# EAGLE board lock-board2_esp8266 (EAGLE 7.6.0)
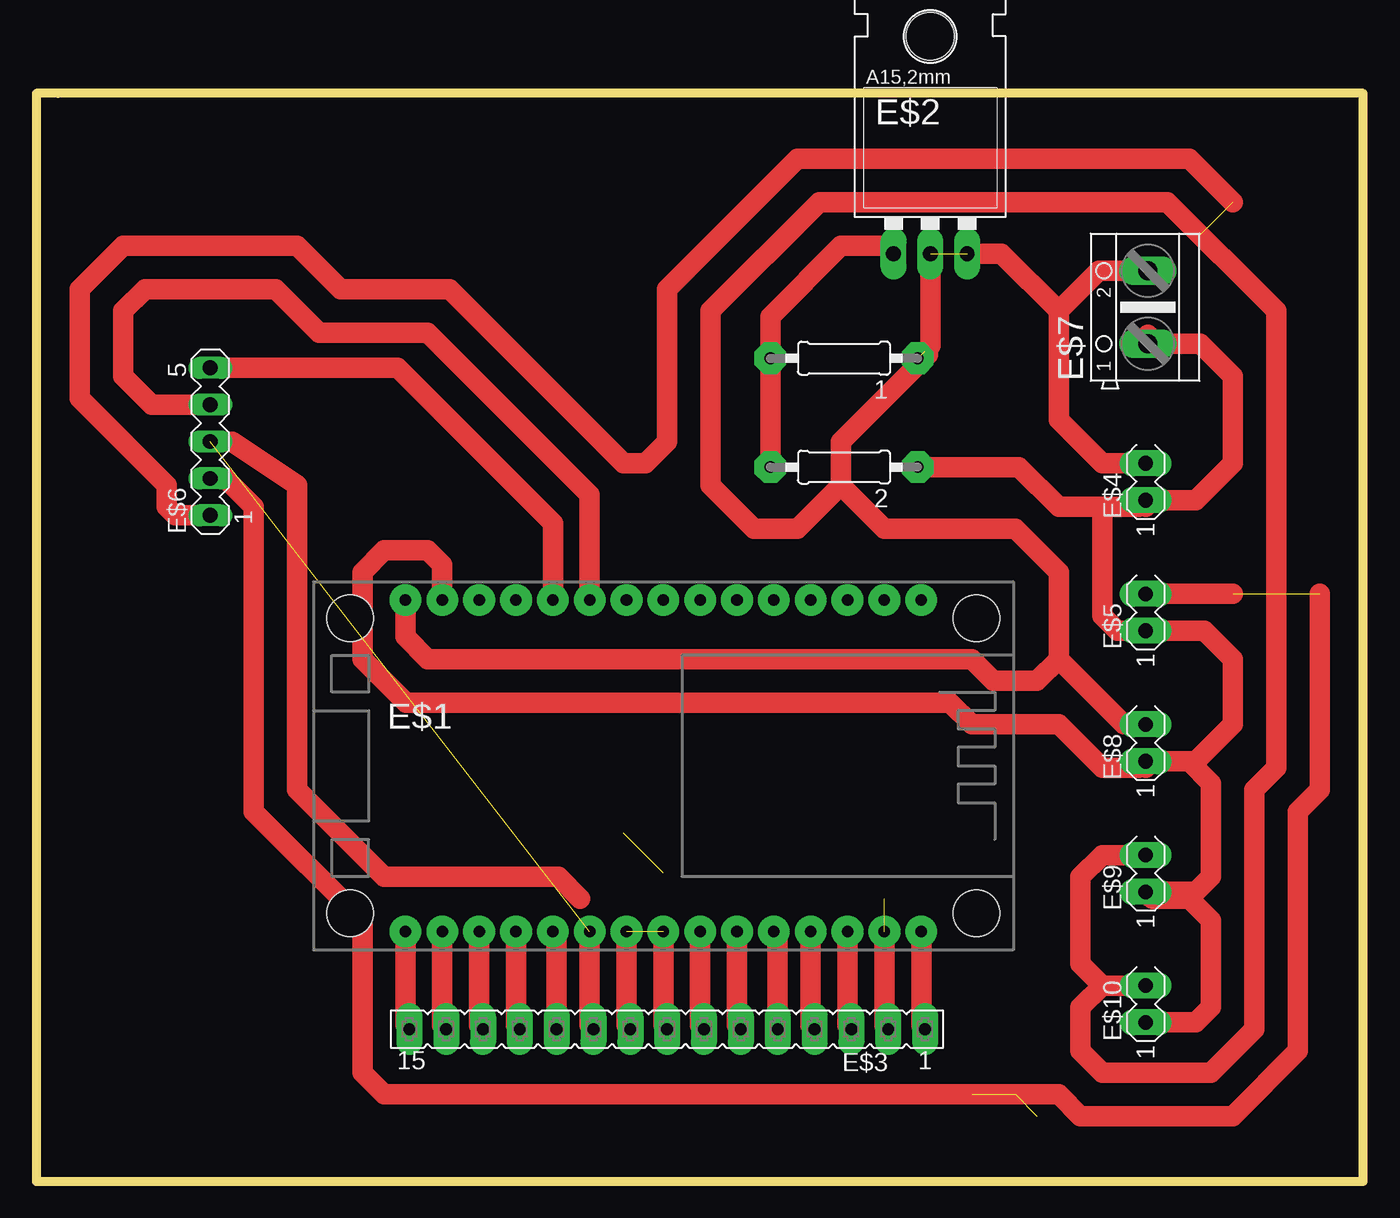
[diagram p0: board, top side]
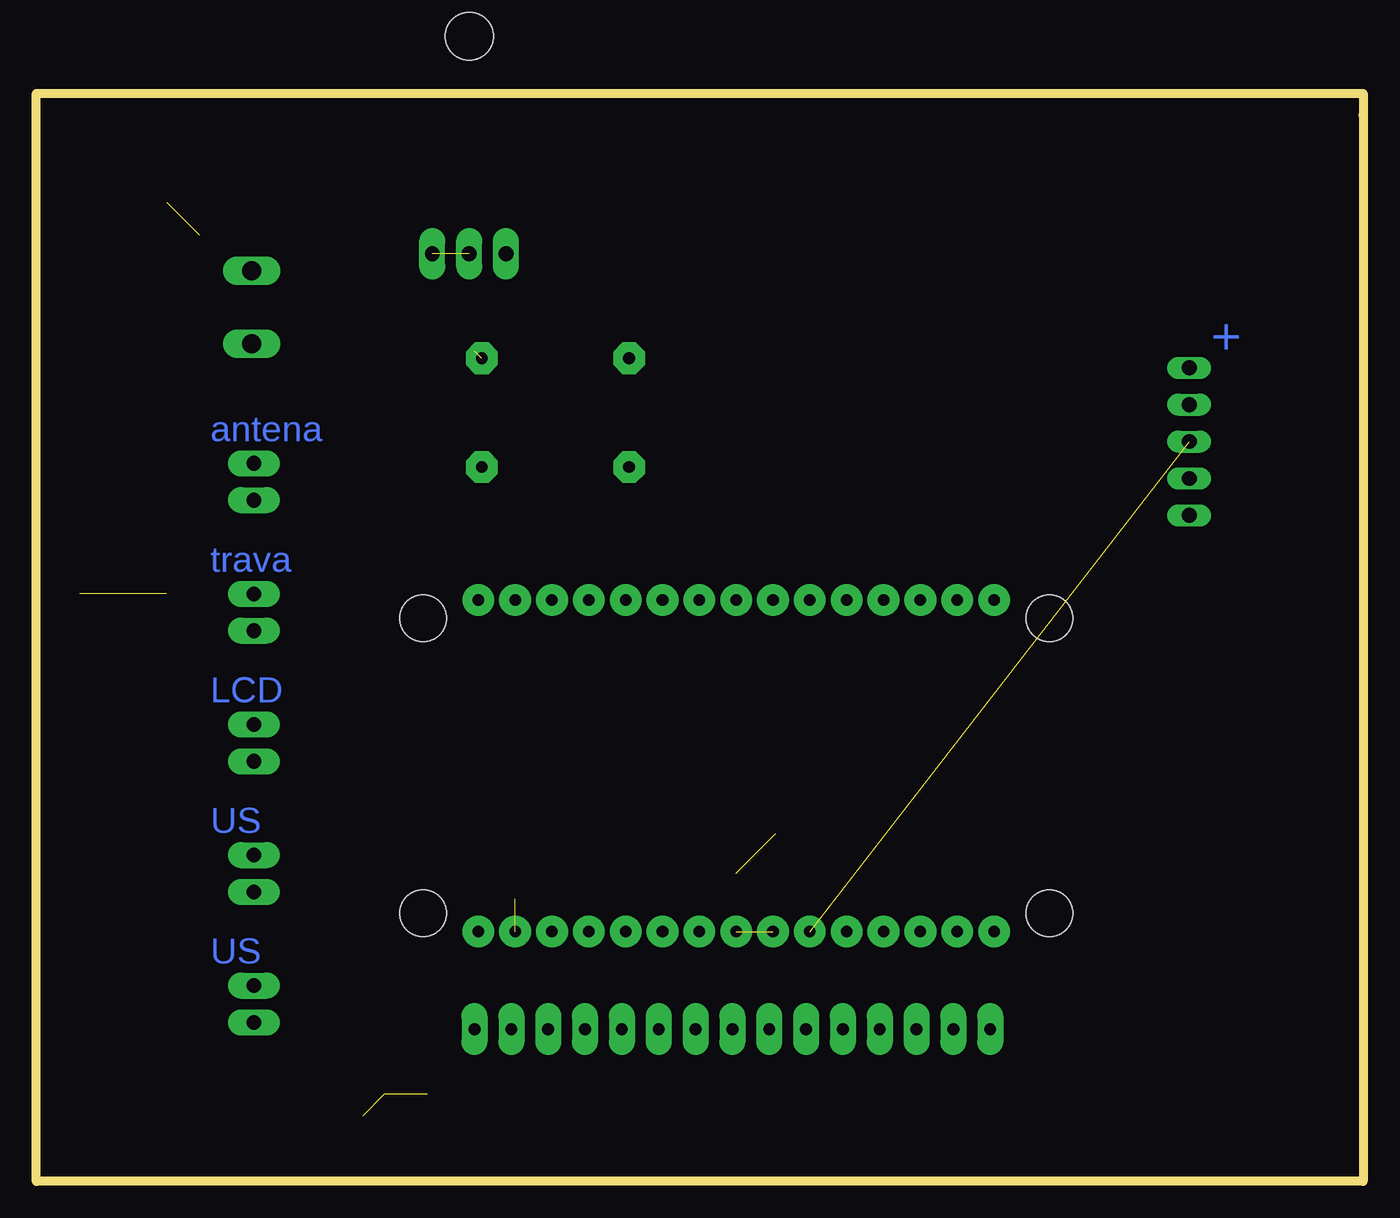
[diagram p1: board, bottom side, seen from below]

Size 91.5 x 75 mm. Coordinates in mm from the lower left corner, seen from the top.
Outline: 1.5,75 0,75 0,73.5 0,0 91.5,0 91.5,75 1.5,75
Copper layers (1*16): Top 0.035mm / dielectric 1.5mm / Bottom 0.035mm
Design rules "default": minimum track width 10mil, minimum drill 24mil, track to track 8mil, track to pad 8mil, pad to pad 8mil, via to via 8mil, smd to smd 8mil, copper to edge 40mil, drill to drill 8mil, minimum pad ring 10mil, minimum via ring 8mil, stop-mask expansion 4mil, vias tented up to drill 0mil, thermal gap 10mil
Net classes: 0 default: clearance 0.205 mm

## Footprints (pad centres in the part's own frame; a part is rotated, then mirrored left to right if it is on the bottom)
0207/10 = drill 0.813 pad 2.184 octagon: 1 -5.08,0; 2 5.08,0
ESP12E_DEVKIT = drill 0.8 pad 2.184: 3V3@0 -11.43,-7.62; 3V3@1 11.43,5.08; 3V3@2 11.43,-17.78; AD0 -11.43,17.78; CLK -11.43,-2.54; CMD -11.43,2.54; D0 11.43,17.78; D1 11.43,15.24; D2 11.43,12.7; D3 11.43,10.16; D4 11.43,7.62; D5 11.43,0; D6 11.43,-2.54; D7 11.43,-5.08; D8 11.43,-7.62; EN -11.43,-10.16; GND@0 -11.43,-5.08; GND@1 -11.43,-15.24; GND@2 11.43,2.54; GND@3 11.43,-15.24; RST -11.43,-12.7; RSV@0 -11.43,15.24; RSV@1 -11.43,12.7; RX 11.43,-10.16; SD0 -11.43,0; SD1 -11.43,5.08; SD2 -11.43,7.62; SD3 -11.43,10.16; TX 11.43,-12.7; VIN -11.43,-17.78 | hole 3.2: -10.16,21.59; 10.16,21.59; 10.16,-21.59; -10.16,-21.59
317TL = drill 1.016 pad 1.778 long: 1 -2.54,-3.81; 2 0,-3.81; 3 2.54,-3.81 | hole 3.302: 0,11.176
FE15 = drill 0.813 pad 1.778 long: 1 -17.78,0; 2 -15.24,0; 3 -12.7,0; 4 -10.16,0; 5 -7.62,0; 6 -5.08,0; 7 -2.54,0; 8 0,0; 9 2.54,0; 10 5.08,0; 11 7.62,0; 12 10.16,0; 13 12.7,0; 14 15.24,0; 15 17.78,0
MA03-1 = drill 1.016 pad 1.778 long: 1 -2.54,0; 2 0,0
MA05-1 = drill 1.016 long: 1 -5.08,0; 2 -2.54,0; 3 0,0; 4 2.54,0; 5 5.08,0
AK500/2 = drill 1.321 long: 1 -2.515,0; 2 2.515,0

## Placement (x,y rotation side)
1  [0207/10]  55.7,56.74 180 top
2  [0207/10]  55.7,49.24 180 top
E$1  [ESP12E_DEVKIT]  43.24,28.65 270 top
E$2  [317TL]  61.65,67.76 0 top
E$3  [FE15]  43.5,10.5 180 top
E$4  [MA03-1]  76.5,49.5 90 top
E$5  [MA03-1]  76.5,40.5 90 top
E$6  [MA05-1]  12,51 90 top
E$7  [AK500/2]  76.65,60.26 90 top
E$8  [MA03-1]  76.5,31.5 90 top
E$9  [MA03-1]  76.5,22.5 90 top
E$10  [MA03-1]  76.5,13.5 90 top

## Library data of the parts
1 2 = eagle-ltspice
E$1 = ESP12E_DEVKIT
E$2 = v-reg
E$3 = con-lsta
E$4-E$6 E$8-E$10 = con-lstb
E$7 = con-ptr500

## Nets
S$1: 1.1 E$1.VIN E$2.2 E$2.3 E$4.2 E$6.1 E$7.2 E$8.2 E$9.2 E$10.2
S$2: E$1.D2 E$3.3
S$3: E$1.D0 E$3.1
S$4: E$1.D8 E$3.11
S$5: E$5.2 E$6.2
S$6: E$1.3V3@0 E$6.5
S$7: 2.1 E$1.GND@1 E$4.1 E$5.1 E$7.1 E$8.1 E$9.1 E$10.1
S$8: 1.2 2.2 E$2.1
S$10: E$1.GND@0 E$6.4
S$11: E$1.D7 E$3.10 E$6.3
S$12: E$1.D1 E$3.2
S$13: E$1.D3 E$3.4
S$14: E$1.D4 E$3.5
S$15: E$1.3V3@1 E$3.6
S$16: E$1.GND@2 E$3.7
S$20: E$1.RX E$3.12
S$21: E$1.TX E$3.13
S$22: E$1.D5 E$1.D6 E$3.8 E$3.9
S$24: E$1.3V3@2 E$3.15
S$25: E$1.GND@3 E$3.14

## Tracks (layer width: path | path; a pad name or v marks a point on that pad's centre or on a via)
S$1  (3 unrouted)
  Top 1.422: 61.5,57 61.27,57.23 61.65,57.61 E$2.2 | E$4.2 73.5,49.5 70.5,52.5 70.5,60 | E$7.2 73.28,62.78 70.5,60 | 70.5,60 66.55,63.95 E$2.3 64.5,63.64 | E$1.VIN 25.46,37.54 27,36 64.5,36 66,34.5 69,34.5 70.5,36 | E$8.2 75,31.5 70.5,36 | 70.5,36 70.5,42 67.5,45 58.5,45 55.5,48 | 55.5,48 55.5,51 60.78,56.28 1.1 | 75,22.5 E$9.2 73.5,22.5 72,21 72,15 73.5,13.5 | 73.5,13.5 72,12 72,9 73.5,7.5 81,7.5 84,10.5 84,27 85.5,28.5 85.5,60 78,67.5 54,67.5 46.5,60 46.5,48 49.5,45 52.5,45 55.5,48 | E$10.2 73.5,13.5 | E$6.1 9.58,45.92 9,46.5 9,48 3,54 3,61.5 6,64.5 18,64.5 21,61.5 28.5,61.5 40.5,49.5 42,49.5 43.5,51 43.5,61.5 52.5,70.5 79.5,70.5 82.5,67.5
S$2
  Top 1.422: E$1.D2 55.94,10.76 E$3.3
S$3
  Top 1.422: E$1.D0 61.02,10.76 E$3.1
S$4
  Top 1.422: E$3.11 35.88,16.96 E$1.D8
S$5  (1 unrouted)
  Top 1.422: E$6.2 13.04,48.46 15,46.5 15,25.5 22.5,18 22.5,7.5 24,6 70.5,6 72,4.5 82.5,4.5 87,9 87,25.5 88.5,27 88.5,40.5 | E$5.2 82.5,40.5
S$6
  Top 1.422: E$1.3V3@0 35.62,45.38 24.92,56.08 E$6.5
S$7
  Top 1.422: E$10.1 79.96,10.96 81,12 81,18 79.5,19.5 76.96,19.5 E$9.1 79.96,19.96 81,21 81,27.46 79.5,28.96 | 76.65,58.35 E$7.1 80.25,57.75 82.5,55.5 82.5,49.5 79.96,46.96 76.96,46.96 | 76.96,46.96 E$4.1 76.04,46.5 73.5,46.5 | E$8.1 79.5,28.96 | 79.5,28.96 79.96,28.96 82.5,31.5 82.5,36 80.54,37.96 E$5.1 74.54,37.96 73.5,39 73.5,46.5 | 76.5,28.5 E$8.1 | 2.1 67.76,49.24 70.5,46.5 73.5,46.5 | 76.96,46.96 76.5,46.5 | E$1.GND@1 28,42.5 27,43.5 24,43.5 22.5,42 22.5,36 25.5,33 63,33 64.5,31.5 70.5,31.5 73.5,28.5 76.04,28.5 E$8.1
S$8
  Top 1.422: E$2.1 58.56,64.5 55.5,64.5 50.62,59.62 1.2 2.2
S$9  (2 unrouted)
S$10
  Top 1.422: E$6.4 7.96,53.54 6,55.5 6,60 7.5,61.5 16.5,61.5 19.5,58.5 27,58.5 38.16,47.34 E$1.GND@0
S$11  (1 unrouted)
  Top 1.422: 38.42,16.96 E$1.D7 38.16,10.76 E$3.10 | E$6.3 13.5,51 18,48 18,27 24,21 36,21 37.5,19.5
S$12  (1 unrouted)
  Top 1.422: E$1.D1 58.48,10.76 E$3.2
S$13
  Top 1.422: E$1.D3 53.4,10.76 E$3.4
S$14
  Top 1.422: E$3.5 51.12,16.96 E$1.D4
S$15
  Top 1.422: E$1.3V3@1 48.32,10.76 E$3.6
S$16
  Top 1.422: E$1.GND@2 45.78,10.76 E$3.7
S$20
  Top 1.422: E$1.RX 33.08,10.76 E$3.12
S$21
  Top 1.422: E$1.TX 30.54,10.76 E$3.13
S$22  (1 unrouted)
  Top 1.422: E$1.D6 40.7,10.76 E$3.9 | E$1.D5 43.24,10.76 E$3.8
S$23  (1 unrouted)
S$24
  Top 1.422: E$1.3V3@2 25.46,10.76 E$3.15
S$25
  Top 1.422: E$1.GND@3 28,10.76 E$3.14

## Text on the board
Bottom: + | antena | trava | LCD | US | US